# Altium PCB Alarm_Clock.PcbDoc
Units mil, origin at the board's own origin, x right, y up, seen from the top; angles counter-clockwise.
Board outline 3128 x 4371 mil, 2 copper layers (Top Layer, Bottom Layer); 82 components, 70 nets, 265 pads, 19 vias.
Unrouted connection lines stored in the file: 2.
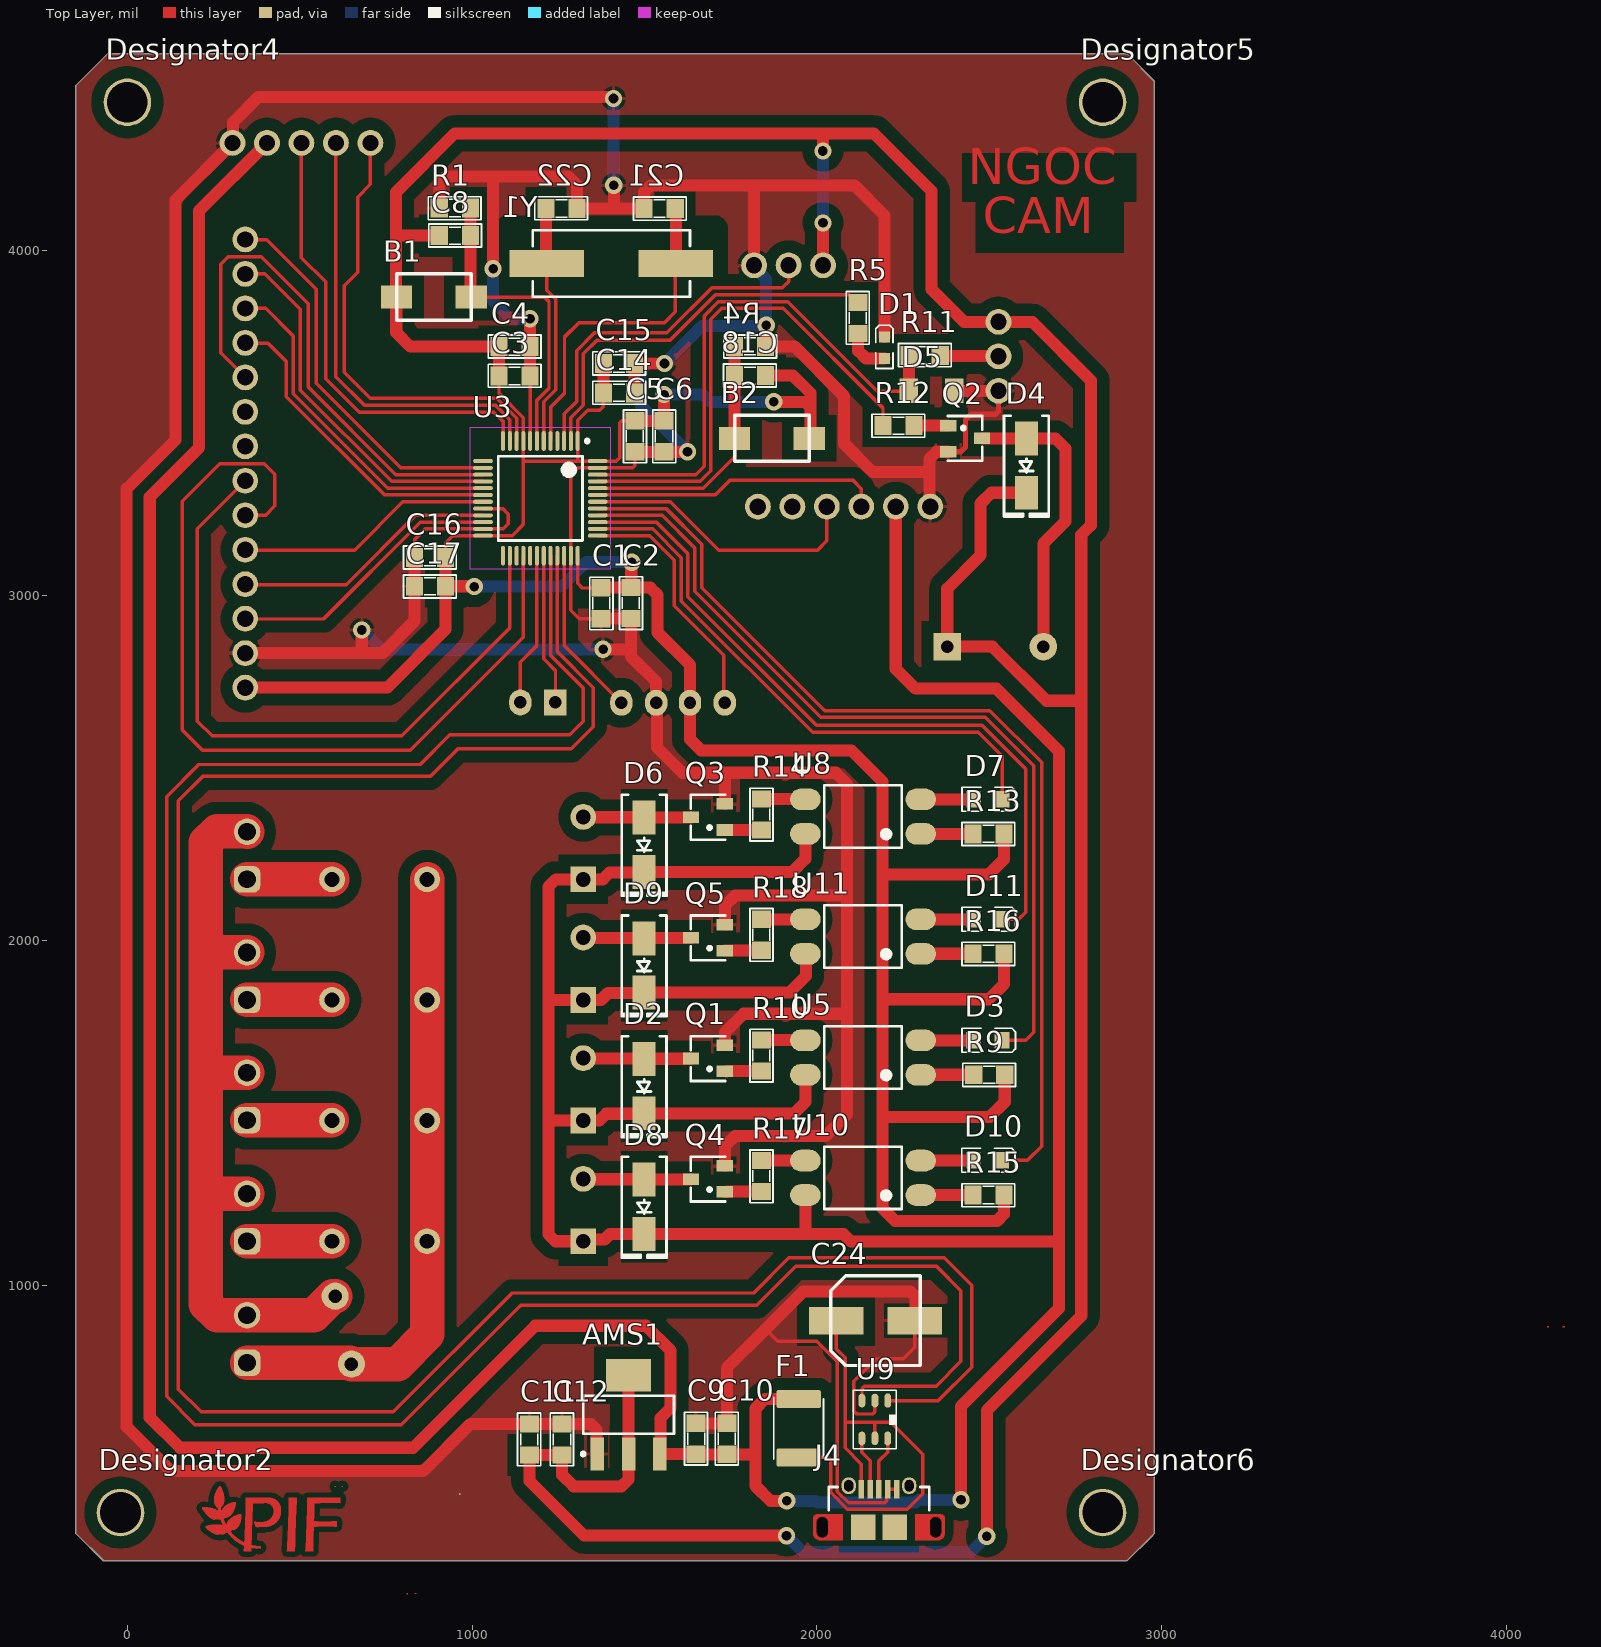
[diagram p0: Top Layer view]
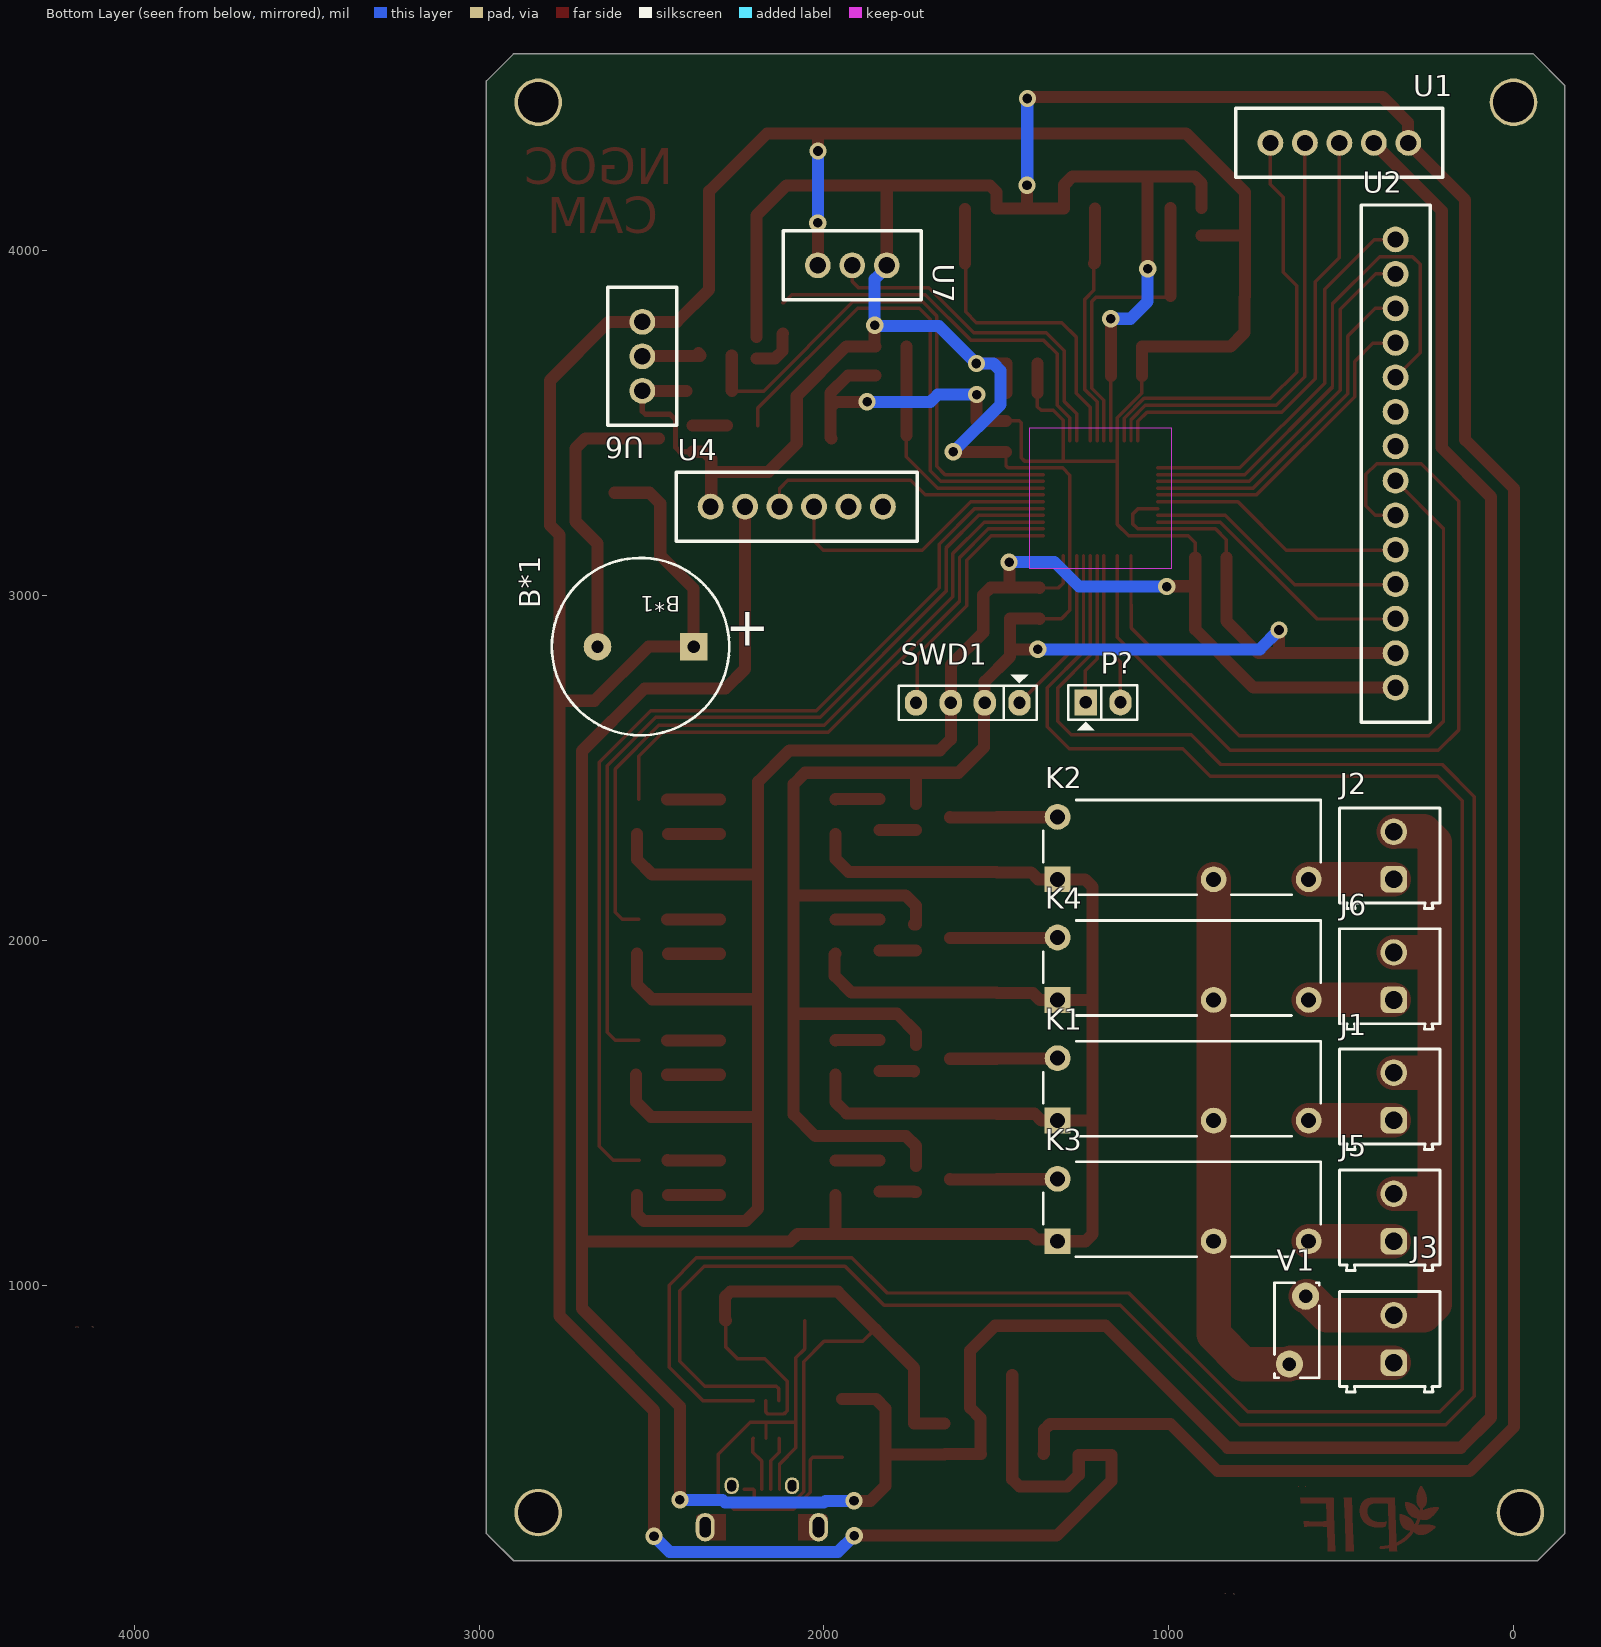
[diagram p1: Bottom Layer view, seen from below]
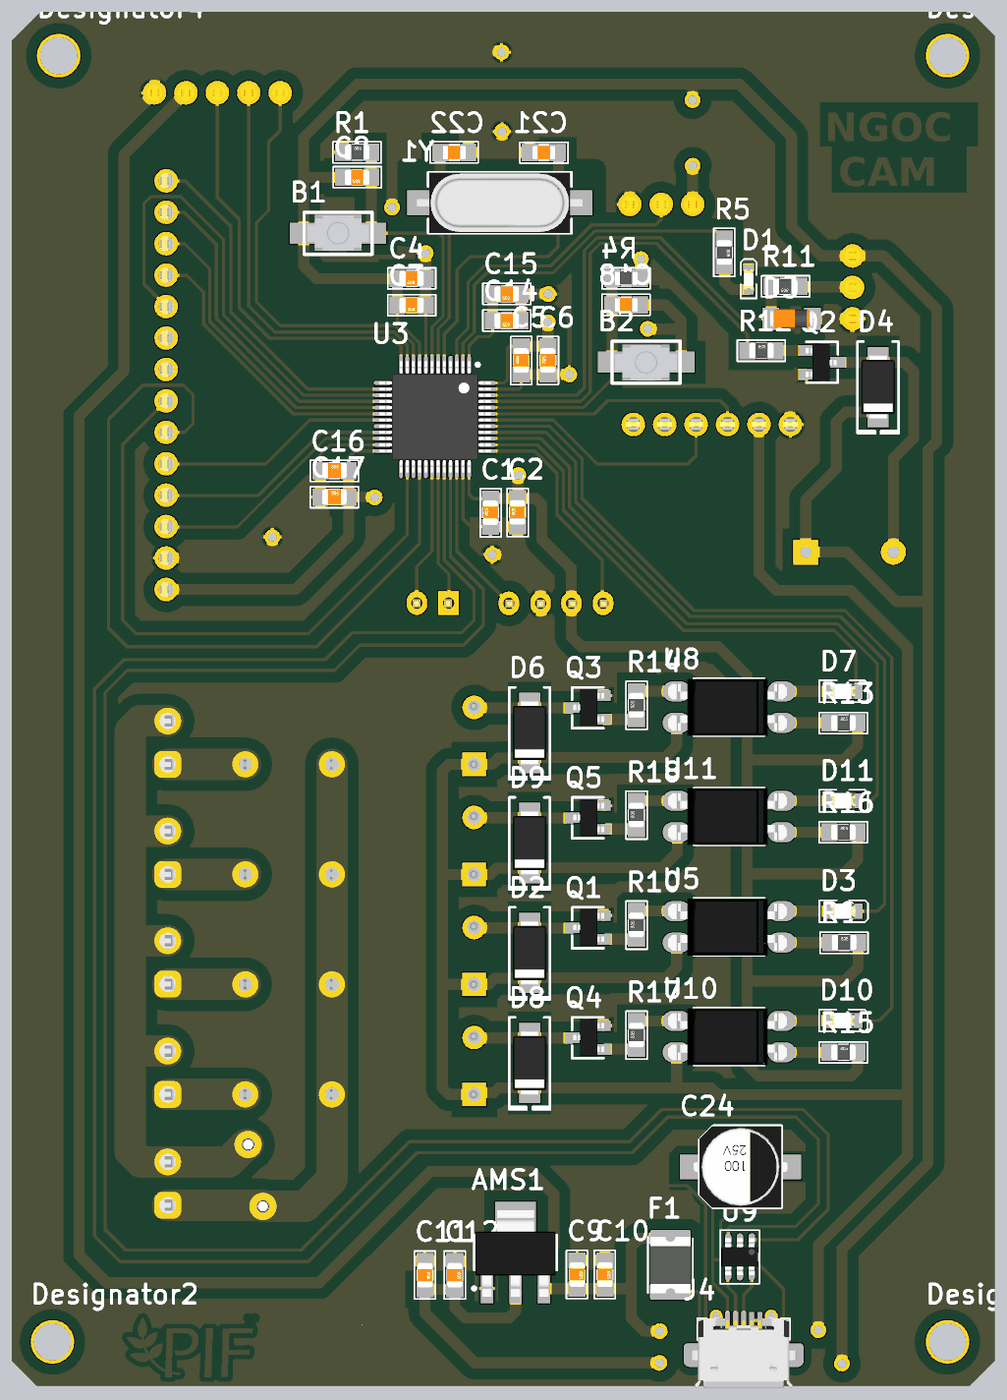
[diagram p2: 3D render of the assembled board from above, using the file's embedded part models]
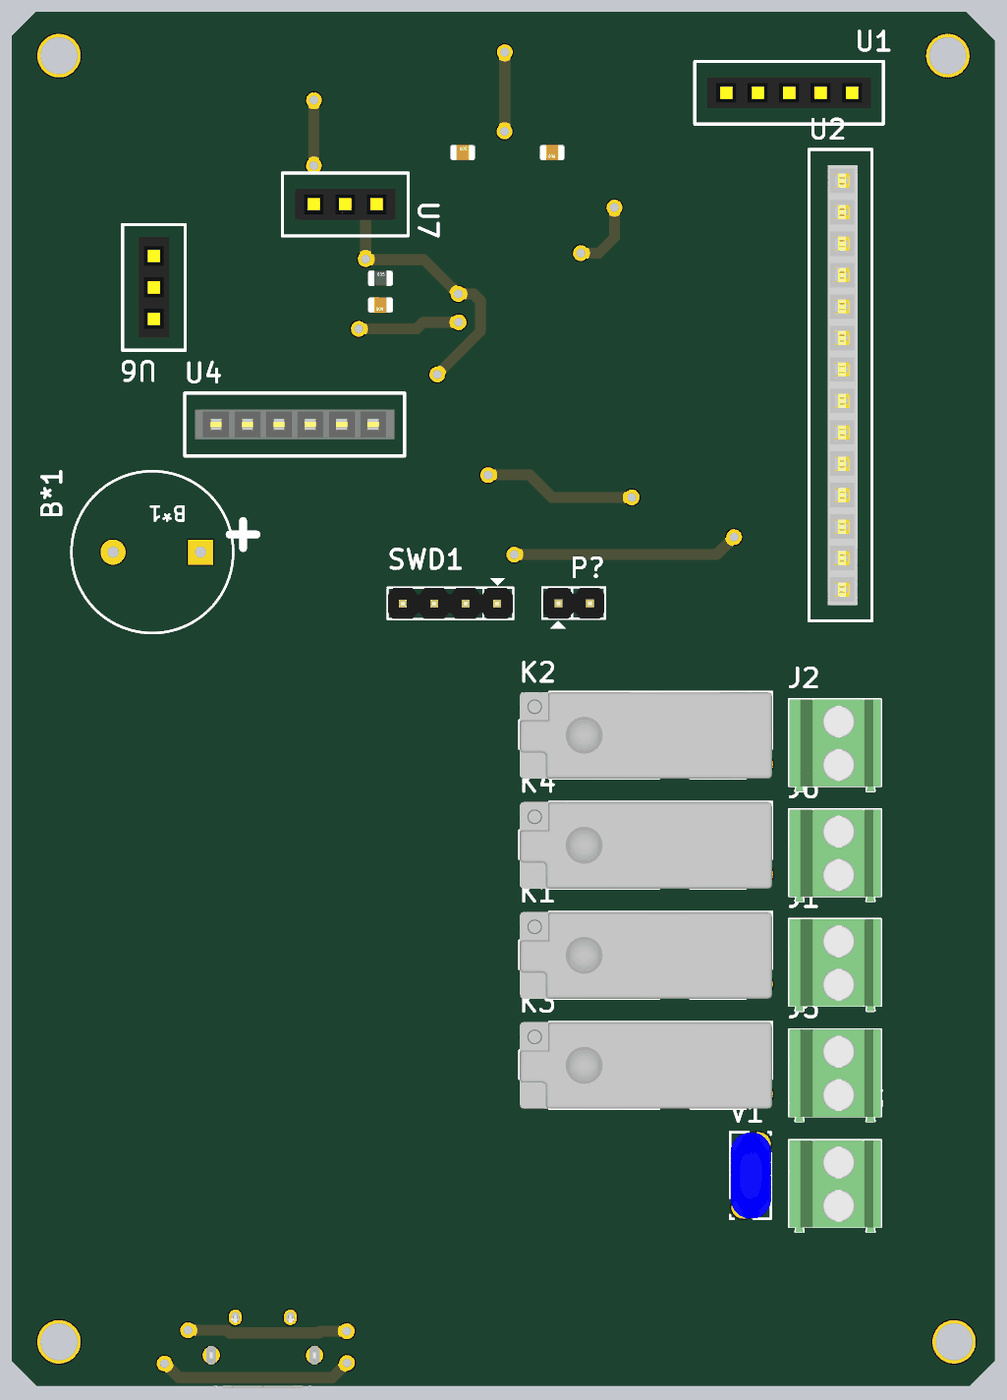
[diagram p3: 3D render of the assembled board from below, using the file's embedded part models]

## Layer stack, top to bottom
Top Solder: solder mask 0.4, Solder Resist, Dk 3.5
Top Layer: signal copper 1.4
Dielectric 1: dielectric 12.6, FR-4, Dk 4.8
Bottom Layer: signal copper 1.4
Bottom Solder: solder mask 0.4, Solder Resist, Dk 3.5

## Board outline
-149,279 -70,200 2900,200 2970,270 2979,279 2979,4493 2901,4571 -58,4571 -149,4480

## Design rules (kind name [scope] priority, off if disabled: settings)
Clearance [All] p1: gap=15 ignorepadtopadclearanceinfootprint=FALSE except(5: Arc-Arc Arc-Track Arc-SMDPad Track-Track Track-SMDPad Track-THPad SMDPad-SMDPad; 35: Arc-Poly Track-Poly SMDPad-Poly THPad-Poly Via-Poly Fill-Poly Poly-Poly)
PolygonConnect [All] p1: connectstyle=Relief reliefconductorwidth=10 reliefentries=4 polygonreliefangle="90 Angle" airgapwidth=10
RoutingVias [All] p1: holewidth=31.5 width=47.24 viastyle="Through Hole" minholewidth=31.5 minwidth=47.24 maxholewidth=31.5 maxwidth=47.24
SolderMaskExpansion [All] p1: expansion=4 istentingtop=FALSE
Width [All] p1: maxlimit=100 minlimit=10 preferedwidth=35
30 further rules are at their usual default settings.

## Classes and differential pairs
component class Alarm_Clock: AMS1 B1 B*1 C1 C2 C3 C4 C5 C6 C8 C9 C10 C11 C12 C14 C15 C16 C17 C18 C21 C22 C24 D1 D2 D3 D4 D5 D6 D7 D8 D9 D10 D11 F1 J1 J2 J3 J4 J5 J6 K1 K2 K3 K4 P? Q1 Q2 Q3 Q4 Q5 R1 R4 R5 R9 R10 R11 R12 R13 R14 R15 R16 R17 R18 SWD1 U1 U2 U3 U4 U5 U6 U7 U8 U9 U10 U11 V1

## Components (designator, comment, footprint, x,y, rotation, side; value= is the part's Value field where it differs from the comment)
AMS1 "AMS1117-3.3V" SOT223 1454,624.17 r0 top value="AMS1117-3.3V SOT223"
B1 "Button SMD 2 Pin 3x4mm" "BUTTON SMD 2 PIN" 997.54,3866 r180 top
B2 "Button SMD 2 Pin 3x4mm" "BUTTON SMD 2 PIN" 1761.46,3456 r0 top
B*1 "Buzzer" BUZZER 2457,2852 r0 bottom
C1 "Cap Non-Pol SMD" CAP-SM-0805 1374.5,2932.5 r90 top value=1uF
C2 "Cap Non-Pol SMD" CAP-SM-0805 1460.5,2933.5 r90 top value=10nF
C3 "Cap Non-Pol SMD" CAP-SM-0805 1168,3637 r180 top value=1uF
C4 "Cap Non-Pol SMD" CAP-SM-0805 1168,3722 r180 top value=10nF
C5 "Cap Non-Pol SMD" CAP-SM-0805 1472,3417 r90 top value=1uF
C6 "Cap Non-Pol SMD" CAP-SM-0805 1557,3417 r90 top value=10nF
C8 "Cap Non-Pol SMD" CAP-SM-0805 995,4044 r180 top value=1uF
C9 "Cap Non-Pol SMD" CAP-SM-0805 1650,599 r270 top value=10uF
C10 "Cap Non-Pol SMD" CAP-SM-0805 1739,599 r270 top value=1uF
C11 "Cap Non-Pol SMD" CAP-SM-0805 1166,597 r270 top value=1uF
C12 "Cap Non-Pol SMD" CAP-SM-0805 1261,597 r270 top value=10uF
C14 "Cap Non-Pol SMD" CAP-SM-0805 1471,3588 r180 top value=1uF
C15 "Cap Non-Pol SMD" CAP-SM-0805 1471,3673 r180 top value=10nF
C16 "Cap Non-Pol SMD" CAP-SM-0805 833,3111 r0 top value=1uF
C17 "Cap Non-Pol SMD" CAP-SM-0805 833,3027 r0 top value=10nF
C18 "Cap Non-Pol SMD" CAP-SM-0805 1761,3638 r0 top value=1uF
C21 "Cap Non-Pol SMD" CAP-SM-0805 1589,4123 r180 top value=10pF
C22 "Cap Non-Pol SMD" CAP-SM-0805 1214,4123 r0 top value=10pF
C24 "47uF" "tu nhom 6.3 (d)" 2170.18,896.57 r0 top
D1 "LED SMD" LED_0603_Blue 2196,3719 r90 top
D2 "SS34" "DIODE SMA" 1499,1577 r270 top
D3 "LED SMD" LED_0805_Blue 2496,1710 r0 top
D4 "SS34" "DIODE SMA" 2608,3377 r270 top
D5 "3.3V" "DIODE ZENNER SMD SOD80" 2333,3594 r180 top
D6 "SS34" "DIODE SMA" 1499,2277 r270 top
D7 "LED SMD" LED_0805_Blue 2496,2409 r0 top
D8 "SS34" "DIODE SMA" 1499,1227 r270 top
D9 "SS34" "DIODE SMA" 1499,1927 r270 top
D10 "LED SMD" LED_0805_Blue 2495,1362 r0 top
D11 "LED SMD" LED_0805_Blue 2496,2061 r0 top
Designator2 "Comment" "LO KHOAN 3MM" -20,340 r0 top
Designator4 "Comment" "LO KHOAN 3MM" 0,4431 r0 top
Designator5 "Comment" "LO KHOAN 3MM" 2829,4431 r0 top
Designator6 "Comment" "LO KHOAN 3MM" 2829,340 r0 top
F1 "2A 24V" "Cau chi tu phuc hoi 2A 24V SMD1812" 1947.18,584.57 r90 top
J1 "10A, 300V" 691214110002 359,1547 r90 bottom
J2 "10A, 300V" 691214110002 359,2245.9 r90 bottom
J3 "10A, 300V" 691214110002 359,843.58 r90 bottom
J4 "Micro USB 2.0 Type AB" 629105150921 2180.18,297.57 r0 top
J5 "10A, 300V" 691214110002 359,1195.9 r90 bottom
J6 "10A, 300V" 691214110002 359,1895.9 r90 bottom
K1 "277 VAC, 30 VDC" HF46F 958.17,1567.55 r0 bottom
K2 "277 VAC, 30 VDC" HF46F 958.17,2267.55 r0 bottom
K3 "277 VAC, 30 VDC" HF46F 958.17,1217.55 r0 bottom
K4 "277 VAC, 30 VDC" HF46F 958.17,1917.55 r0 bottom
P? "Header 2" JP2 1241,2690 r180 bottom
Q1 "HF" SOT-23 1684,1657 r90 top value=C9014
Q2 "HF" SOT-23 2430,3456 r270 top value=C9014
Q3 "HF" SOT-23 1684,2357 r90 top value=C9014
Q4 "HF" SOT-23 1684,1307 r90 top value=C9014
Q5 "HF" SOT-23 1684,2007 r90 top value=C9014
R1 "RESISTOR SMD" RES-SM-0805 905,4124 r0 top value=10K
R4 "RESISTOR SMD" RES-SM-0805 1851,3723 r180 top value=10K
R5 "RESISTOR SMD" RES-SM-0805 2119,3850 r270 top value=300
R9 "RESISTOR SMD" RES-SM-0805 2455,1610 r0 top value=100
R10 "RESISTOR SMD" RES-SM-0805 1839,1621 r90 top value=10K
R11 "RESISTOR SMD" RES-SM-0805 2358,3697 r180 top value=1K
R12 "RESISTOR SMD" RES-SM-0805 2192,3493 r0 top value=10K
R13 "RESISTOR SMD" RES-SM-0805 2453,2309 r0 top value=100
R14 "RESISTOR SMD" RES-SM-0805 1839,2320 r90 top value=10K
R15 "RESISTOR SMD" RES-SM-0805 2453,1261 r0 top value=100
R16 "RESISTOR SMD" RES-SM-0805 2453,1961 r0 top value=100
R17 "RESISTOR SMD" RES-SM-0805 1839,1271 r90 top value=10K
R18 "RESISTOR SMD" RES-SM-0805 1839,1971 r90 top value=10K
SWD1 "Header 4" JP4 1533,2689 r0 bottom
U1 "Rotary Encoder" "Header 5 Pin" 705,4313 r180 bottom
U2 "ILI9341" ILI9341 342,4033 r270 bottom
U3 "STM32F103xx_LQFP48" STM32_LQPF48 1198,3282 r270 top
U4 "DS3231 RTC" DS3231 1929,3058 r0 bottom
U5 "OPTO PC817 SMD" SOP4 2134,1660 r180 top value=PC817
U6 "PIR" PIR 2527,3794 r270 bottom
U7 "DHT11" DHT11 2018,3958 r180 bottom
U8 "OPTO PC817 SMD" SOP4 2134,2359 r180 top value=PC817
U9 "USBLC6-2SC6 TVS" SOT23-6 2173.18,605.57 r270 top
U10 "OPTO PC817 SMD" SOP4 2134,1311 r180 top value=PC817
U11 "OPTO PC817 SMD" SOP4 2134,2011 r180 top value=PC817
V1 "AC 300V" Varistor 629,867 r90 bottom
Y1 "16MHz" WE-XTAL_HC49/4HSMX 1404,3963 r180 top

## Footprints (in the part's own frame and the unit in brackets; to place one, negate y for a bottom-side part, rotate by r counter-clockwise, add the part's x,y. Pads: shape width x height; smd on the part's side, far side on the other; paste and mask are expansions set on the pad)
629105150921 [mm] "Micro USB 2.0 Type AB Horizontal"
  rect 0.4x1.35 smd: 1(-1.3,2.805) 2(-0.65,2.805) 3(0,2.805) 4(0.65,2.805) 5(1.3,2.805)
  round 0 / inner oval 1.4x2.1 / far side oval 1.4x2.1 hole 0.825 slot 1.5 at 90 deg: Shell(-4.175,0)
  oval 1.05x1.25 hole 0.65 slot 0.85 at 90 deg: Shell(-2.225,3.055) Shell(2.225,3.055)
  rect 1.8x1.9 smd: Shell(-1.15,0) Shell(1.15,0)
  round 0 / inner round 0 / far side oval 1.4x2.1 hole 0.825 slot 1.5 at 90 deg: Shell(4.175,0)
  Top Layer region: -4.353,-0.95 -4.544,-0.912 -4.706,-0.804 -4.814,-0.641 -4.852,-0.45 -4.852,-0.45 -4.852,0.65 -4.83,0.765 -4.765,0.862 -4.667,0.927 -4.553,0.95 -4.553,0.95 -2.668,0.95 -2.668,-0.95
  Top Layer region: 4.353,-0.95 4.544,-0.912 4.706,-0.804 4.814,-0.641 4.852,-0.45 4.852,-0.45 4.852,0.65 4.83,0.765 4.765,0.862 4.667,0.927 4.553,0.95 4.553,0.95 2.668,0.95 2.668,-0.95
  silkscreen extent -3.7,1.25 3.7,2.97, body extent -4.3,-2.64 4.3,3.23, height 2.76
691214110002 [mm] "3.50 mm Horizontal Entry Modular, 2p"
  rrect50% 1.95x1.95 hole 1.3: 1(-1.75,-0.3)
  round 1.95 hole 1.3: 2(1.75,-0.3)
  silkscreen extent -3.9,-3.7 3.5,3.7, body extent -3.95,-3.7 3.5,3.7, height 8.55
"BUTTON SMD 2 PIN" [mm] "Button SMD 2 Pin 3x4mm"
  rect 2.3x1.7 smd: 1(0,0) 2(5.5,0)
  silkscreen extent 0,-1.7 5.5,1.7, body extent 0.24,-1.48 5.24,1.42, height 2
BUZZER [mil]
  rect 80x80 hole 36: 1(-78.73,0)
  round 80 hole 36: 2(200,0)
  silkscreen extent -182,-257 332,257
CAP-SM-0805 [mil]
  rect 50x55 smd: 1(0,0) 2(90,0)
  silkscreen extent -32,-34 121,33, body extent 6,-25 84,25, height 31
"Cau chi tu phuc hoi 2A 24V SMD1812" [mm]
  rrect25% 1.34x3.29 smd: 1(-2.15,0) 2(2.15,0)
  silkscreen extent -2.28,-1.83 2.28,1.83, body extent -2.27,-1.62 2.27,1.62, height 1.25
DHT11 [mm]
  round 1.9 hole 1.2: 1(0,0) 2(2.54,0) 3(5.08,0)
  silkscreen extent -2.54,-2.54 7.62,2.54, body extent -1.52,-1.25 6.6,1.25, height 4.75
"DIODE SMA" [mm] "SMA"
  rect 2.5x1.7 smd: 1(-2,0) 2(2,0)
  silkscreen extent -3.68,-1.65 3.75,1.65, body extent -2.6,-1.37 2.6,1.37, height 2.4
"DIODE ZENNER SMD SOD80" [mm] "SOD80"
  rect 1.35x1.8 smd: 1(1.675,0) 2(-1.675,0)
  body extent -1.75,-0.76 1.75,0.74, height 1.45
DS3231 [mm]
  round 1.9 hole 1.2: 1(-2.54,-5.08) 2(0,-5.08) 3(2.54,-5.08) 4(5.08,-5.08) 5(7.62,-5.08) 6(10.16,-5.08)
  silkscreen extent -5.08,-7.62 12.7,-2.54, body extent -4.24,-6.28 11.86,-3.88, height 8.3
"Header 5 Pin" [mm] "2.54mm"
  round 1.9 hole 1.2: 1(0,0) 2(2.54,0) 3(5.08,0) 4(7.62,0) 5(10.16,0)
  silkscreen extent -2.54,-2.54 12.7,2.54, body extent -1.52,-1.25 11.68,1.25, height 4.75
HF46F [mm]
  rect 1.9x1.9 hole 1.1: 1(9.25,2.3)
  round 1.9 hole 1.1: 2(9.25,-2.3) 3(-2.25,2.3) 4(-9.25,2.3)
  silkscreen extent -10.14,-3.55 10.31,3.44, body extent -10.14,-3.55 10.26,3.45, height 15.76
ILI9341 [mm]
  round 1.9 hole 1.2: 1(0,0) 2(2.54,0) 3(5.08,0) 4(7.62,0) 5(10.16,0) 6(12.7,0) 7(15.24,0) 8(17.78,0) 9(20.32,0) 10(22.86,0) 11(25.4,0) 12(27.94,0) 13(30.48,0) 14(33.02,0)
  silkscreen extent -2.54,-2.54 35.56,2.54, body extent -1.27,-1.02 34.29,1.4, height 11.05
JP2 [mil]
  rect 65x75 hole 36: 1(0,0)
  oval 65x75 hole 36: 2(101,0)
  silkscreen extent -50,-81 150,50, body extent -48,-50 148,48, height 323
JP4 [mil] "Jumper 4"
  oval 65x75 hole 36: 1(-100,0) 2(1,0) 3(99,0) 4(200,0)
  silkscreen extent -150,-81 250,50, body extent -148,-48 248,50, height 323
LED_0603_Blue [mm] "Chip LED, 2-Leads, Body 1.6x0.8mm, IPC Medium Density"
  rect 0.8x0.8 smd: 1(-0.8,0) 2(0.8,0)
  silkscreen extent -1.52,-0.64 1.65,0.64, body extent -0.8,-0.4 0.8,0.4, height 0.7
LED_0805_Blue [mm] "Chip LED, 2-Leads, Body 2.0x1.3mm, IPC Medium Density"
  rect 1.1x1.2 smd: 1(-1.05,0) 2(1.05,0)
  silkscreen extent -1.91,-0.89 2.03,0.89, body extent -1,-0.63 1,0.62, height 0.68
"LO KHOAN 3MM" [mil]
  round 138 hole 118.1: 1(0,0)
PIR [mm]
  round 1.9 hole 1.2: 1(0,0) 2(2.54,0) 3(5.08,0)
  silkscreen extent -2.54,-2.54 7.62,2.54, body extent -1.52,-1.25 6.6,1.25, height 4.75
RES-SM-0805 [mil]
  rect 50x55 smd: 1(0,0) 2(90,0)
  silkscreen extent -32,-34 121,33, body extent 6,-25 84,25, height 31
SOP4 [mm]
  oval 2.25x1.6 smd: 1(-4.25,1.27) 2(-4.25,-1.27) 3(4.25,-1.27) 4(4.25,1.27)
  silkscreen extent -2.85,-2.3 2.85,2.3, body extent -4.67,-2.29 4.93,2.31, height 3.6
SOT23-6 [mil]
  oct 40x20 smd: 1(-59.41,32.4)
  oval 40x20 smd: 2(-59.41,-4.6) 3(-59.41,-42.6) 4(50.59,-42.6) 5(50,-5) 6(50.59,32.4)
  silkscreen extent -89,-68 81,57, body extent -64,-64 54,54, height 51
SOT223 [mm]
  rect 1x2.4 smd: 1(-2.3,-2.9) 2(0,-2.9) 3(2.3,-2.9)
  rect 3.3x2.4 smd: 4(0,2.9)
  silkscreen extent -3.47,-3.02 3.35,1.4, body extent -3.25,-3.56 3.25,3.4, height 1.68
SOT-23 [mm] "SOT 23 _ 1-3-2"
  rect 0.85x1.2 smd: 1(-0.94,-1.245) 2(0.985,-1.25) 3(0.005,1.25)
  silkscreen extent -1.65,-1.27 1.65,1.27, body extent -1.47,-1.33 1.53,1.17, height 1.06
STM32_LQPF48 [mm]
  oval 1.45x0.3 smd: 1(-4.225,2.75) 2(-4.225,2.25) 3(-4.225,1.75) 4(-4.225,1.25) 5(-4.225,0.75) 6(-4.225,0.25) 7(-4.225,-0.25) 8(-4.225,-0.75) 9(-4.225,-1.25) 10(-4.225,-1.75) 11(-4.225,-2.25) 12(-4.225,-2.75) 25(4.225,-2.75) 26(4.225,-2.25) 27(4.225,-1.75) 28(4.225,-1.25) 29(4.225,-0.75) 30(4.225,-0.25) 31(4.225,0.25) 32(4.225,0.75) 33(4.225,1.25) 34(4.225,1.75) 35(4.225,2.25) 36(4.225,2.75)
  oval 0.3x1.45 smd: 13(-2.75,-4.225) 14(-2.25,-4.225) 15(-1.75,-4.225) 16(-1.25,-4.225) 17(-0.75,-4.225) 18(-0.25,-4.225) 19(0.25,-4.225) 20(0.75,-4.225) 21(1.25,-4.225) 22(1.75,-4.225) 23(2.25,-4.225) 24(2.75,-4.225) 37(2.75,4.225) 38(2.25,4.225) 39(1.75,4.225) 40(1.25,4.225) 41(0.75,4.225) 42(0.25,4.225) 43(-0.25,4.225) 44(-0.75,4.225) 45(-1.25,4.225) 46(-1.75,4.225) 47(-2.25,4.225) 48(-2.75,4.225)
  silkscreen extent -4.35,-3.1 3.1,3.58, body extent -4.5,-4.5 4.5,4.5, height 1.6
"tu nhom 6.3 (d)" [mm]
  rect 4x2 smd: 1(-2.9,0) 2(2.9,0)
  silkscreen extent -3.3,-3.3 3.3,3.3, body extent -3.8,-3.3 3.8,3.3, height 8
Varistor [mm]
  round 2 hole 1: 1(-2.442,0.535) 2(2.558,-0.665)
  silkscreen extent -3.44,-1.67 3.56,1.63, body extent -3.44,-1.71 3.56,1.59, height 8.5
WE-XTAL_HC49/4HSMX [mm] "Quartz Crystal, size HC49/4HSMX, body 11.4x4.9mm"
  rect 5.5x2 smd: 1(-4.75,0) 2(4.75,0)
  silkscreen extent -5.8,-2.45 5.8,2.45, body extent -6.7,-2.45 6.7,2.45, height 4.3

## Part data
AMS1: library part "AMS1117 SMD", "Dán", Chung_Loai=Dán, Don_Vi=Con, Ma_Hang=MH000596
B1 B2: library part BUTTON
C1 C2 C3 C4 C5 C6 C8 C9 C10 C11 C12 C14 C15 C16 C17 C18 C21 C22: "Capacitor"
C24: library part "Tu Nhom 47uF 50V", "Dán", Chung_Loai=Dán, Don_Vi=Con, Ma_Hang=MH002217, So_Chan=2, Ten_Linh_Kien="Tụ Nhôm 47uF 50V 6.3x5.5MM"
D1 D3 D7 D10 D11: "LED"
D2 D4 D6 D8 D9: library part "Diode SS34 ( 1N5822 )", "Dán", Chung_Loai=Dán, Don_Vi=Con, Ma_Hang=MH002104, Ten_Linh_Kien="Diode SS34 3A 40V SMA ( 1N5822 SS34A)"
D5: library part "Diode Zener 3.3V", "Dán", Chung_Loai=Dán, Don_Vi=Con, Ma_Hang=MH002880, Ten_Linh_Kien="Diode Zener 1/2W 3.3V SMD1206 ZMM3.3"
F1: library part "Cau chi tu phuc hoi 2A 24V SMD1812", "2A 24V SMD1812", Ma_Hang=MH010033, Ten="Cầu Chì Tự Phục Hồi 2A 24V SMD1812"
J1 J2 J3 J5 J6: library part 691214110002, "WR-TBL Series 2141 Horizontal Entry Modular, THT, pitch 3.5mm, 2p", Manufacturer="Wurth Elektronik", Operating Temperature Max=105°C, Operating Temperature Min=-40°C, Rated Current=10A, Working Voltage=300V, Application="Rising Cage Clamp", Category="Terminal Blocks", ComponentLink1Description="Website Link", ComponentLink1URL=https://www.we-online.com/redexpert/article/691214110002?ad, ComponentLink2Description="Supplier 1 URL", ComponentLink2URL=N/A, ComponentLink3Description="Supplier 2 URL", ComponentLink3URL=N/A, ComponentLink4Description="Supplier 3 URL", ComponentLink4URL=https://www.thegioiic.com/kf350-2-v-domino-2-chan-thang-3-5mm-300v-10a-han-pcb, Manufacturer Part Number=691214110002, Match Code=WR-TBL, Modularity=Yes, Mount="Through Hole", Number of Pins=2, Number of Rows=1, Orientation=Horizontal, Packaging=Box, Pitch=3.5mm, Supplier 1 Name=Mouser, Supplier 1 SN=N/A, Supplier 1 URL=N/A, Supplier 2 Name=Digi-Key, Supplier 2 SN=N/A, Supplier 2 URL=N/A, Supplier 3 Name=thegioiic, Supplier 3 SN=N/A, Supplier 3 URL=https://www.thegioiic.com/kf350-2-v-domino-2-chan-thang-3-5mm-300v-10a-han-pcb
J4: library part 629105150921, "Micro USB 2.0 Type AB Receptacle WR-COM, Horizontal, SMT", Contact Resistance="30 mOhm", Operating Temperature="-40 to 85 degC", Rated Current="1.8 A", Working Voltage="30 VAC", ComponentLink1Description=Datasheet, ComponentLink1URL=https://katalog.we-online.de/em/datasheet/629105150921.pdf, ComponentLink2Description="Supplier 1 URL", ComponentLink2URL=N/A, ComponentLink3Description="Supplier 2 URL", ComponentLink3URL=N/A, ComponentLink4Description="Supplier 3 URL", ComponentLink4URL=N/A, Connector Type="Micro USB 2.0 Type AB", Gender=Receptacle, Mounting Technology=SMT, Orientation=Horizontal, Packaging="Tape and Reel", Part Number=629105150921, Published Date="September 2018", Publisher="Wurth Elektronik", Supplier 1 Name=Mouser, Supplier 1 SN=710-629105150921, Supplier 1 URL=https://www.mouser.vn/ProductDetail/Wurth-Elektronik/629105150921?qs=a9WhcLg8qCztfCBvRE9gEg%3D%3D, Supplier 2 Name=Digi-Key, Supplier 2 SN=N/A, Supplier 2 URL=N/A, Supplier 3 Name=thegioiic, Supplier 3 SN=N/A, Supplier 3 URL=N/A
K1 K2 K3 K4: library part "HF46F-G 12-HS1", "Coil Voltage: 12 VDC; Contact Current Rating: 7A; Switching Voltage Max: 277 VAC, 30 VDC", Coil Current=N/A, Coil Voltage="12 VDC", Contact Current Rating=7A, Associated Relay Series=N/A, Coil Resistance=N/A, ComponentLink1Description="Datasheet link", ComponentLink1URL=https://source.hongfa.com//pdf/web/viewer.html?file=/Uploads/Product/PDF/HF46F-G_en.pdf?timestamp=1691116874, ComponentLink2Description="Supplier 1 URL", ComponentLink2URL=N/A, ComponentLink3Description="Supplier 2 URL", ComponentLink3URL=N/A, ComponentLink4Description="Supplier 3 URL", ComponentLink4URL=https://www.thegioiic.com/hf46f-g-12-hs1-ro-le-12vdc-7a-spst-no-4-chan, Power Consumption=N/A, Supplier 1 Name=Mouser, Supplier 1 SN=N/A, Supplier 1 URL=N/A, Supplier 2 Name=Digi-Key, Supplier 2 SN=N/A, Supplier 2 URL=N/A, Supplier 3 Name=thegioiic, Supplier 3 SN=N/A, Supplier 3 URL=https://www.thegioiic.com/hf46f-g-12-hs1-ro-le-12vdc-7a-spst-no-4-chan, Switching Voltage Max="277 VAC, 30 VDC"
P?: "Header, 2-Pin", LatestRevisionDate=17-Jul-2002, LatestRevisionNote="Re-released for DXP Platform.", Publisher="Altium Limited"
Q1 Q2 Q3 Q4 Q5: library part "Trans C1815 HF SMD", "SOT-23"
R1 R4 R5 R9 R10 R11 R12 R13 R14 R15 R16 R17 R18: "Resistor"
SWD1: "Header, 4-Pin", LatestRevisionDate=17-Jul-2002, LatestRevisionNote="Re-released for DXP Platform.", Publisher="Altium Limited"
U2: "ILI9341 Module 3.2 240x320"
U4: library part DS3231, "DS3231 RTC Module"
U5 U8 U10 U11: "Single Opto"
U9: library part IC_LTC6992IS6-1, "Oscillator, Silicon IC 3.81Hz ~ 1MHz TSOT-23-6", Alternate Part Number-1=NA, Case/Package=SOT-23-6, Manufacturer="Linear Technology/Analog Devices", Manufacturer Part Number=LTC6992IS6-1, Supplier Part Number-1=LTC6992IS6-1#TRMPBF, Supplier-1=Arrow
V1: library part 05000730110, "Varistors 7D471K AC 300V", Capacitance=N/A, Manufacture  Name=Bourns, Manufacture  SN=7D471K, Tolerance="+/- 10%", Voltage=300V, ComponentLink1Description="Datasheet link", ComponentLink1URL=N/A, ComponentLink2Description="Supplier 1 URL", ComponentLink2URL=N/A, ComponentLink3Description="Supplier 2 URL", ComponentLink3URL=N/A, ComponentLink4Description="Supplier 3 URL", ComponentLink4URL=N/A, Diameter=7mm, Supplier 1 Name=Mouser, Supplier 1 SN=N/A, Supplier 1 URL=N/A, Supplier 2 Name=Digi-Key, Supplier 2 SN=N/A, Supplier 2 URL=N/A, Supplier 3 Name=thegioiic, Supplier 3 SN=N/A, Supplier 3 URL=https://www.thegioiic.com/tu-chong-set-varistor-7d471k-300v
Y1: library part 071105166016, "WE-XTAL Quartz Crystal, SMT, HC49/4HSMX, 16MHz, +/-30ppm", Frequency Stability=+/-50ppm, Frequency Tolerance=+/-30ppm, Load Capacitance=16pF, Manufacturer="Wurth Elektronik", Manufacturer Part Number=830003237, Operating Temperature="-10 to +60degC", ComponentLink1Description="Datasheet link", ComponentLink1URL=https://katalog.we-online.com/pbs/datasheet/830003237.pdf, ComponentLink2Description="Supplier 1 URL", ComponentLink2URL=https://www.mouser.com/ProductDetail/Wurth-Elektronik/830003237?qs=2WXlatMagcFy7La1wROd1w%3D%3D, ComponentLink3Description="Supplier 2 URL", ComponentLink3URL=https://www.digikey.com/en/products/detail/w%C3%BCrth-elektronik/830003237/13979248, ComponentLink4Description="Supplier 3 URL", ComponentLink4URL=https://www.thegioiic.com/thach-anh-16mhz-2-chan-smd-hc49-s, Frequency=16MHz, Mounting Technology=SMT, Size=HC49/4HSMX, Supplier 1 Name=Mouser, Supplier 1 SN=710-830003237, Supplier 1 URL=https://www.mouser.com/ProductDetail/Wurth-Elektronik/830003237?qs=2WXlatMagcFy7La1wROd1w%3D%3D, Supplier 2 Name=Digi-Key, Supplier 2 SN=732-830003237TR-ND, Supplier 2 URL=https://www.digikey.com/en/products/detail/w%C3%BCrth-elektronik/830003237/13979248, Supplier 3 Name=thegioiic, Supplier 3 SN=N/A, Supplier 3 URL=https://www.thegioiic.com/thach-anh-16mhz-2-chan-smd-hc49-s
U3: ComponentLink1Description="Manufacturer Link", ComponentLink1URL=www.st.com/stm32, ComponentLink2Description=Datasheet, ComponentLink2URL=http://www.st.com/stonline/products/literature/ds/13587.pdf, DatasheetVersion="rev6, Mar-2008", PackageDescription="48-Pin Low-Profile Quad Flat Pack, 7 x 7 mm Body, 0.5 mm Pitch (LQFP48)", PackageReference=LQFP48, PackageVersion=Mar-2008, Published=30-May-2008, Publisher="Altium Limited"

## Via types
v1: diameter 50, hole 28, Top Layer to Bottom Layer, 19 vias

## Nets (pads, with @x,y where several pads share a name; then routed paths per layer and width w, separated by ;. In a path a pad name is that pad's centre, name@x,y a point inside that pad or via, vN(x,y) a via of type N, cw(c..) or ccw(c..) an arc to the next point about the centre after c; other vN are vias at no path point)
+3.3V: AMS1.2 AMS1.4 B1.2 B2.2 B*1.1 C1.2 C2.2 C3.2 C4.2 C5.2 C6.2 C8.2 C11.2 C12.2 C14.2 C15.2 C16.2 C17.2 C18.2 D4.2 R9.2 R13.2 R15.2 R16.2 SWD1.3 U2.7 U2.14 U3.1 U3.9 U3.24 U3.36 U3.48 U6.1 U7.1 | length 18901.2
  Top Layer w10: C16.2 923,3153 943.73,3173.73 U3.24 1116.27,3173.73 1148.79,3206.25 1148.79,3390.27 ; C3.2 1078,3587 1148.79,3516.21 U3.9 1148.79,3390.27 ; U3.36 1306.27,3035.73 1320,3022 1373,3022 1373.5,3021.5 C1.2 ; C14.2 1381,3548 1370,3537 1335,3537 1306.27,3508.27 U3.1 1306.27,3390.27 ; C5.2 1433.86,3507 1428,3501.14 1428,3400 1418.27,3390.27 U3.48 1306.27,3390.27 ; 1148.79,3390.27 1306.27,3390.27
  Top Layer w35: U2.14 754,2733 923,2902 C17.2 ; B1.2@779,3868 779,4038 ; B1.2@780,3865 780,3763 821,3722 C4.2 C3.2 ; C8.2 785,4044 779,4038 ; C16.2 C17.2 ; v1(1006,3026) 1005,3027 C17.2 ; C1.2 1375,3023 1460,3023 C2.2 ; C14.2 C15.2 ; AMS1.4 AMS1.2 1454,436.5 1433.5,416 1294.5,416 1261,449.5 C12.2 C11.2 1166,432.11 1325.11,273 v1(1912.16,273) ; v1(1463,3097) 1461.75,3095.75 1461.75,3024.75 C2.2 ; C5.2 C6.2 v1(1557,3583) ; C18.2 1931,3638 1981,3588 1981,3546 ; v1(1875,3562) 1876,3561 1966,3561 1981,3546 ; B2.2 1981,3459 1981,3546 ; v1(2017.5,4289.5) 2018,4290 2018,4341 ; U7.1 v1(2018,4081) ; v1(2493,271) 2493,636 2767,910 2767,2691 ; R15.2 2543,1206.5 2522.5,1186 2227,1186 2191,1222 2191,1488 ; R16.2 2543,1873 2499,1829 2191,1829 ; R13.2 2543,2235 2499,2191 2200,2191 2191,2182 ; R9.2 2545,1531 2502,1488 2191,1488 ; D4.2 2506.26,3298.26 2475,3267 2475,3117 2378.27,3020.27 B*1.1 2509,2852 2666,2695 2763,2695 2767,2691 ; 779,4038 779,4170 950,4341 2018,4341 ; C2.2 1470.13,3023.5 1470.5,3023.13 1516.87,3023.13 1538,3002 1538,2893 1632,2799 SWD1.3 1632,2583 1664,2551 2100,2551 2191,2460 2191,2182 ; 2018,4341 2165,4341 2333,4173 2333,3888 2427,3794 U6.1 2625,3794 2795,3624 2795,3204 2767,3176 2767,2691 ; 2191,1488 2191,1829 ; 2191,1829 2191,2182
  Bottom Layer w35: v1(1006,3026) 1260,3026 1332,3098 1462,3098 v1(1463,3097) ; v1(1557,3583) 1670,3583 1691,3562 v1(1875,3562) ; v1(1912.16,273) 1959.16,226 2448,226 v1(2493,271) ; v1(2017.5,4289.5) 2017.75,4289.25 2017.75,4081.25 v1(2018,4081)
+5V: AMS1.3 C9.2 C10.2 D2.2 D6.2 D8.2 D9.2 F1.2 K1.1 K2.1 K3.1 K4.1 U1.4 U4.5 U5.4 U8.4 U10.4 U11.4 | length 15638.2
  Top Layer w35: U1.4 208,4116 208,3429 65,3286 65,616 153,528 829,528 1183,882 1504,882 1576,810 1576,644 1546,614 1546,511.45 AMS1.3 1545.05,509.5 1649.5,509.5 C9.2 C10.2 1822,509 ; v1(1913,374) 1865,374 1822,417 1822,509 ; F1.2 1849.21,669.21 1822,642 1822,509 ; U10.4 1966.68,1155.5 1959.43,1148.26 ; U5.4 1966.68,1530.68 1934.26,1498.26 D2.2 1497.74,1497 1389,1497 1369,1477 K1.1 1222,1477 1221,1476 ; U11.4 1969,1958.68 1969,1897 1920.26,1848.26 D9.2 1497.74,1847 1394,1847 1374,1827 K4.1 1221,1827 ; U8.4 1966.68,2236.32 1928.61,2198.26 D6.2 1497.74,2197 1399,2197 1379,2177 K2.1 1243,2177 1221,2155 1221,1827 ; U4.5 2229,2787 2286,2730 2521,2730 2702,2549 2702,1126 ; v1(2418,377) 2418,648 2702,932 2702,1126 ; 1221,1476 1221,1827 ; 1221,1476 1221,1147.5 1241.5,1127 K3.1 1327.35,1132 1384,1132 1400.26,1148.26 D8.2 1959.43,1148.26 ; 1959.43,1148.26 2076.74,1148.26 2099,1126 2702,1126
  Bottom Layer w35: v1(1913,374) 1995.41,374 2000.8,368.61 2286.54,368.61 2294.93,377 v1(2418,377)
BOOT0: B2.1 C18.1 R4.2 U3.44 | length 746.3
  Top Layer w10: U3.44 1670.53,3311.53 1761.46,3402.46 B2.1
  Top Layer w35: B2.1@1761,3465 C18.1 R4.2
BUZZER: R12.1 U3.45 | length 1464.8
  Top Layer w10: U3.45 1661.21,3331.21 1692,3362 1692,3802 1724,3834 1902,3834 2192,3544 R12.1
CH1_TIM2: U1.1 U3.10 | length 1318.1
  Top Layer w10: U1.1 705,4193 668,4156 668,3938 629,3899 629,3648 705,3572 1071.79,3572 1129.1,3514.68 U3.10
CH2_TIM2: U1.2 U3.11 | length 1296.2
  Top Layer w10: U1.2 605,3635 688,3552 1068,3552 1109.42,3510.58 U3.11
GND: AMS1.1 C1.1 C2.1 C3.1 C4.1 C5.1 C6.1 C9.1 C10.1 C11.1 C12.1 C14.1 C15.1 C16.1 C17.1 C21.2 C22.2 C24.2 D1.2 D5.2 J4.4 J4.5 Q1.2 Q2.2 Q3.2 Q4.2 Q5.2 R1.1 R4.1 SWD1.2 U1.5 U2.13 U3.8 U3.20 U3.23 U3.35 U3.47 U4.6 U6.3 U7.3 U9.2 | length 20999.8
  Top Layer w10: C16.1 833,3162 864.42,3193.42 U3.23 1090.42,3193.42 1105,3208 1105,3236 1088.53,3252.47 U3.20 ; C3.1 1168.47,3636.53 U3.8 ; C1.1 1374,2933 1311,2933 1286.58,2957.42 U3.35 1286.58,3349.58 1307.58,3370.58 U3.47 1466.14,3370.58 1472,3376.44 C5.1 ; 1849.5,870.5 1853.5,870.5 1887,837 2000,837 2059,778 2059,401 2092,368 2197.04,368 2202.9,373.86 2202.9,405.13 J4.4 J4.5 ; U9.2 2168.58,631.86 2162.72,626 2116,626 2107,635 2107,721 2172,786 2251,786 2284.35,819.35 C24.2
  Top Layer w15: Q2.2 2418.2,3417.2 2431,3430 2431,3510 2447,3526 2518.21,3526 2527,3534.79 U6.3
  Top Layer w35: U2.13 676,2833 ; v1(680,2900) 680,2837 676,2833 ; C16.1 C17.1 833,2926 740,2833 676,2833 ; R1.1 905,4195.5 925.5,4216 1061,4216 ; v1(1061,3948) 1061,4216 ; C3.1 C4.1 v1(1168,3803) ; AMS1.1 1361.26,512.19 1361.26,580.23 1344.5,597 C12.1 C11.1 1165.5,597.5 995.5,597.5 858,460 127,460 -2,589 -2,3310 140,3452 140,4148 U1.5 306,4314 306,4372 380,4446 1395.39,4446 1396.52,4444.87 1407.13,4444.87 v1(1410,4442) ; C1.1 1375,2933 1460,2933 C2.1 1460.5,2844 ; v1(1380,2844) 1460.5,2844 ; v1(1411,4190) 1411,4123 ; C14.1 C15.1 v1(1558,3673) ; C5.1 C6.1 v1(1625,3417) ; C9.1 C10.1 1739,760 1849.5,870.5 1960,981 2271.5,981 2287,965.5 2287,899.21 C24.2 ; Q4.2 1733.21,1403.21 1762,1432 2025,1432 2088,1495 2088,1787 ; Q1.2 1733.21,1732.5 1787.72,1787 2088,1787 ; Q3.2 1733.21,2484 ; Q5.2@1739.34,2046.57 1738.57,2045.8 Q5.2 1733.21,2100.21 1763,2130 2084,2130 2088,2134 ; U7.3 1818,4185 1813,4190 ; v1(1853,3784) 1853,3725 R4.1 1935,3723 2079,3579 2079,3441 2161,3359 2327,3359 ; D1.2 2196,4103 2109,4190 1813,4190 ; U4.6@2327,3260 2327,3359 ; Q2.2 2347.5,3417.2 2327,3396.7 2327,3359 ; D5.2 U6.3 ; 1061,4216 1279,4216 1304,4191 C22.2 1411,4123 ; 1411,4123 C21.2 1499,4170 1519,4190 1813,4190 ; 1460.5,2844 1460.5,2823.5 1534,2750 SWD1.2 1536,2687 1536,2560 1610,2486 2055,2486 2088,2453 2088,2134 ; 2088,1787 2088,2134
  Bottom Layer w35: v1(680,2900) 736,2844 v1(1380,2844) ; v1(1061,3948) 1061,3853 1111,3803 v1(1168,3803) ; v1(1410,4442) 1410.5,4441.5 1410.5,4190.5 v1(1411,4190) ; v1(1625,3417) 1488,3554 1488,3652.5 1508.5,3673 v1(1558,3673) 1667,3782 1851,3782 v1(1853,3784) 1853,3917.6 1818,3952.6 U7.3
L: J3.1 K1.3 K2.3 K3.3 K4.3 V1.1 | length 1874.4
  Top Layer w100: J3.1 V1.1@646.24,774.68 ; V1.1 783.76,770.86 869.59,856.69 K3.3 K1.3 K2.3
MISO_SPI1: U2.2 U3.16 | length 1076
  Top Layer w10: U2.2 399,3933 502,3830 502,3596 766.79,3331.21 U3.16
MISO_SPI2: U3.27
MOSI_SPI1: U2.3 U3.17 | length 1003.5
  Top Layer w10: U2.3 401,3833 481,3753 481,3586 755.47,3311.53 U3.17
MOSI_SPI2: U2.9 U3.28 | length 2567
  Top Layer w10: U2.9 401,3233 428,3260 428,3352 397,3383 268,3383 159,3274 159,2610 218,2551 821,2551 1148.79,2878.79 U3.28
N: J1.2 J2.2 J3.2 J5.2 J6.2 V1.2 | length 2242.3
  Top Layer w100: J5.2 229.2,1264.8 228,1266 ; J1.2 228.9,1615.9 228,1615 ; J6.2 229.8,1964.8 228,1963 ; J2.2 345.98,2316 260.22,2316 228,2283.78 228,1963 ; V1.2 596.39,967.71 541.16,912.47 J3.2 260.22,912.47 228,944.69 228,1266 ; 228,1266 228,1615 ; 228,1615 228,1963
NetB*1_2: B*1.2 D4.1 Q2.3 | length 858.2
  Top Layer w35: Q2.3 2608.03,3455.77 2608.26,3456 2692,3456 2721,3427 2721,3215 2657,3151 B*1.2 B*1.2@2659,2854
NetC24_1: C24.1 F1.1 J4.1 U9.5 | length 1438.5
  Top Layer w10: F1.1 2032.54,499.92 2040,492.46 2040,398.41 2088.41,350 2262,350 2307,395 2307,509 2214.43,601.57 2166.43,601.57 ; C24.1 2056.18,896.39 2056.18,814.57 2082,788.75 2082,601.57 ; J4.1 2129,480.75 2082,527.75 2082,601.57 ; U9.5 2168.18,599.82 2166.43,601.57 ; 2082,601.57 2166.43,601.57
NetD1_1: D1.1 R5.2 | length 135.7
  Top Layer w35: R5.2 2120,3759 2120,3710 2142.5,3687.5 D1.1
NetD2_1: D2.1 K1.2 Q1.3 | length 314
  Top Layer w35: K1.2 1323.53,1656.92 1497.82,1656.92 D2.1 1499.73,1656.47 1634.06,1656.47 Q1.3
NetD3_1: D3.1 U5.2 | length 153.3
  Top Layer w35: U5.2 D3.1
NetD6_1: D6.1 K2.2 Q3.3 | length 313.4
  Top Layer w35: K2.2 1323.53,2356.92 1497.82,2356.92 1498.37,2356.37 1634.16,2356.37 Q3.3@1634.79,2357
NetD7_1: D7.1 U8.2 | length 153.3
  Top Layer w35: U8.2 D7.1
NetD8_1: D8.1 K3.2 Q4.3 | length 313.4
  Top Layer w35: K3.2 1323.53,1306.92 1497.82,1306.92 1498.27,1306.47 1634.06,1306.47 Q4.3
NetD9_1: D9.1 K4.2 Q5.3 | length 313.4
  Top Layer w35: K4.2 1323.53,2006.92 1497.82,2006.92 1498.27,2006.47 1634.06,2006.47 Q5.3
NetD10_1: D10.1 U10.2 | length 152.8
  Top Layer w35: U10.2 2301.82,1361.5 2453.16,1361.5 D10.1
NetD11_1: D11.1 U11.2 | length 153.3
  Top Layer w35: U11.2 D11.1
NetJ1_1: J1.1 K1.4 | length 247.3
  Top Layer w35: J1.1 J1.1@347.74,1477.55 ; K1.4@593.45,1477.55 K1.4
  Top Layer w100: J1.1@347.74,1477.55 K1.4@593.45,1477.55
NetJ2_1: J2.1 K2.4 | length 246.8
  Top Layer w100: J2.1 K2.4
NetJ4_2: J4.2 U9.4 | length 157.3
  Top Layer w10: U9.4 2130.18,554.58 2130.18,514.57 2154.59,490.16 J4.2
NetJ4_3: J4.3 U9.6 | length 158
  Top Layer w10: J4.3 2180.18,489.57 2206.18,515.57 2206.18,554.38 U9.6
NetJ5_1: J5.1 K3.4 | length 246.8
  Top Layer w100: J5.1 K3.4
NetJ6_1: J6.1 K4.4 | length 246.8
  Top Layer w100: J6.1 K4.4
NetQ1_1: Q1.1 R10.1 | length 101.1
  Top Layer w35: Q1.1@1738.35,1620 1739.35,1621 R10.1
NetQ2_1: Q2.1 R12.2 | length 99
  Top Layer w35: R12.2 Q2.1
NetQ3_1: Q3.1 R14.1 | length 106
  Top Layer w35: Q3.1 R14.1
NetQ4_1: Q4.1 R17.1 | length 106.4
  Top Layer w35: Q4.1 1738.35,1270 1739.35,1271 R17.1
NetQ5_1: Q5.1 R18.1 | length 106.4
  Top Layer w35: Q5.1 1738.35,1970 1739.35,1971 R18.1
NetR9_1: R9.1 U5.1 | length 153.7
  Top Layer w35: U5.1 R9.1
NetR10_2: R10.2 U5.3 | length 128.1
  Top Layer w35: R10.2 1839.5,1710.5 1966.18,1710.5 U5.3
NetR11_1: R11.1 U6.2 | length 178.7
  Top Layer w35: R11.1@2364,3703 R11.1 2359.5,3695.5 2525.5,3695.5 U6.2
NetR13_1: R13.1 U8.1 | length 151.7
  Top Layer w35: U8.1 R13.1
NetR14_2: R14.2 U8.3 | length 128.1
  Top Layer w35: R14.2 1839.5,2409.5 1966.18,2409.5 U8.3
NetR15_1: R15.1 U10.1 | length 151.7
  Top Layer w35: U10.1 R15.1
NetR16_1: R16.1 U11.1 | length 151.7
  Top Layer w35: U11.1 R16.1
NetR17_2: R17.2 U10.3 | length 127.7
  Top Layer w35: R17.2 U10.3
NetR18_2: R18.2 U11.3 | length 127.7
  Top Layer w35: R18.2 U11.3
OSCIN: C21.1 U3.5 Y1.1 | length 968.5
  Top Layer w10: U3.5 1227.53,3546.53 1268,3587 1268,3750 1310,3792 1558,3792 1589,3823 1589,3960.99 Y1.1
  Top Layer w35: Y1.1 C21.1@1591.01,4120.99
OSCOUT: C22.1 U3.6 Y1.2 | length 701.2
  Top Layer w10: U3.6 1207.84,3561.84 1243,3597 1243,3860 1216.99,3886.01 Y1.2
  Top Layer w35: C22.1 1214,3965.99 Y1.2
PA2: U1.3 U3.12 | length 1335.8
  Top Layer w10: U1.3 505,3980 575,3910 575,3629.13 672.13,3532 1063,3532 1089.73,3505.27 U3.12
PA4: U2.1 U3.14 | length 1123.4
  Top Layer w10: U2.1 343,4032 404,4032 548,3888 548,3616 793.42,3370.58 U3.14
PA15: D7.2 U3.38 | length 1644.8
  Top Layer w10: U3.38 1523.58,3193.42 1607,3110 1607,2984 1988,2603 2468,2603 2537.34,2533.66 D7.2
PB0: U2.4 U3.18 | length 932.1
  Top Layer w10: U2.4 343,3732 408,3732 461,3679 461,3577 746.16,3291.84 U3.18
PB1: U2.10 U3.19 | length 748.1
  Top Layer w10: U2.10 343,3132 659,3132 799.16,3272.16 U3.19
PB3: D11.2 U3.39 | length 2103.9
  Top Layer w10: U3.39 1534.9,3213.1 1626,3122 1626,2997 1999,2624 2479,2624 2606,2497 2606,2082 2585,2061 D11.2
PB4: D3.2 U3.40 | length 2513.7
  Top Layer w10: U3.40 1551.21,3232.79 1646,3138 1646,3012 2011,2647 2488,2647 2629,2506 2629,1733 2606,1710 D3.2
PB5: D10.2 U3.41 | length 2912.2
  Top Layer w10: U3.41 1562.53,3252.47 1666,3149 1666,3023 2023,2666 2502,2666 2652,2516 2652,1403 2611,1362 D10.2
PB9: D5.1 R11.2 U3.46 | length 1576.8
  Top Layer w10: U3.46 1648.9,3350.9 1673,3375 1673,3811 1714,3852 1916,3852 2175,3593 2266.06,3593 D5.1
  Top Layer w35: D5.1 2267.53,3594.47 2267.53,3696.53 R11.2
PB10: U2.11 U3.21 | length 773.2
  Top Layer w10: U2.11 343,3032 635,3032 835.79,3232.79 U3.21
PB11: U2.12 U3.22 | length 806.5
  Top Layer w10: U2.12 343,2932 569,2932 850.1,3213.1 U3.22
PC13: R5.1 U3.2 | length 1144.5
  Top Layer w10: U3.2 1286.58,3516.2 1323,3552.62 1323,3701 1362,3740 1573,3740 1706,3873 2093.5,3873 2116.5,3850 R5.1
PC14: U3.3 U7.2 | length 1021.9
  Top Layer w10: U3.3 1266.9,3526.9 1303,3563 1303,3710 1355,3762 1565,3762 1696,3893 1900,3893 1918,3911 U7.2
RESET: B1.1 C8.1 R1.2 U3.7 | length 904.9
  Top Layer w10: B1.1 1210,3866 1223,3853 1223,3602 1188.16,3567.16 U3.7
  Top Layer w35: B1.1@995,3869 C8.1 R1.2
RX_UART1: P?.1 U3.31 | length 440.2
  Top Layer w10: U3.31 1207.84,2816.16 1242,2782 1242,2691 P?.1
SCK_SPI1: U2.5 U3.15 | length 1530.2
  Top Layer w10: U2.5 271,3704 271,3961 293,3983 388,3983 525,3846 525,3605 779.1,3350.9 U3.15
SCK_SPI2: U2.8 U3.26 | length 2017.9
  Top Layer w10: U2.8 203,3194 203,2636 246,2593 796,2593 1109,2906 1109,2973 1109.42,2973.42 U3.26
SCL_I2C1: U3.42 U4.3 | length 832.9
  Top Layer w10: U3.42 1574.84,3272.16 1715,3132 2002,3132 2029,3159 U4.3
SDA_I2C1: U3.43 U4.4 | length 844.1
  Top Layer w10: U3.43 1700.84,3291.84 1701,3292 1706,3292 1748,3334 2105,3334 2129,3310 U4.4
SWCLK: SWD1.4 U3.37 | length 725.8
  Top Layer w10: U3.37 1515.27,3173.73 1586,3103 1586,2971 1730,2827 1730,2692 SWD1.4
SWDIO: SWD1.1 U3.34 | length 495.5
  Top Layer w10: U3.34 1266.9,2855.1 SWD1.1
TX_UART1: P?.2 U3.30 | length 445.6
  Top Layer w10: P?.2 1140,2807 1188.16,2855.16 U3.30
USB_DM: U3.32 U9.3 | length 6675.9
  Top Layer w10: U3.32 1227.53,2826.47 1322,2732 1322,2635 1283,2596 935,2596 849,2510 207,2510 114,2417 114,677 196,595 794,595 1141,942 1826,942 1939,1055 2347,1055 2418,984 2418,779 2346,707 2138,707 2131,700 2131,665.39 U9.3
USB_DP: U3.33 U9.1 | length 6606.9
  Top Layer w10: U3.33 1247.21,2837.79 1352,2733 1352,2620 1288,2556 959,2556 879.3,2476.3 219.3,2476.3 148,2405 148,698 214,632 771,632 1116,977 1817,977 1919,1079 2370,1079 2449,1000 2449,762 2352,665 U9.1
pads on no net: Designator2.1 Designator4.1 Designator5.1 Designator6.1 J4.Shell U2.6 U3.4 U3.13 U3.25 U3.29 U4.1 U4.2

## Polygon pours and split planes (outlines as drawn)
GND on Top Layer "GND_L01_P000" (solid, remove dead copper, pour order 0): -149,279 -149,4480 -58,4571 2901,4571 2979,4493 2979,279 2900,200 -70,200

## Keep-outs
Keep-Out Layer:
  rectangle: 993.28,3077.28 1402.72,3486.72

## Other copper
Top Layer:
  region: 622.82,416.6 622.82,415.97 624.38,415.97 624.38,416.6 625.01,416.6 625.01,415.35 622.19,415.35 622.19,416.6 622.66,416.6
  region: 602.15,415.97 602.15,416.6 602.62,416.6 602.62,416.44 602.93,416.44 602.93,416.6 603.87,416.6 603.87,416.44 604.03,416.44 604.03,416.13 603.87,416.13 603.87,415.97 603.71,415.97 603.71,415.82 603.56,415.82 603.56,415.5 603.71,415.5 603.71,415.35 603.87,415.35 603.87,415.19 604.03,415.19 604.03,415.03 602.15,415.03 602.15,415.82
  region: 199 vertices and 0 holes, not listed, extent 516.49,227.9 617.81,382.62
  region: 169 vertices and 0 holes, not listed, extent 462.93,227.58 491.9,382.93
  region: 5481 vertices and 0 holes, not listed, extent 216.91,227.58 445.55,415.97
  region: 834.74,105.63 834.74,104.9 836.57,104.9 836.57,105.63 837.3,105.63 837.3,104.17 834.01,104.17 834.01,105.63 834.56,105.63
  region: 810.63,104.9 810.63,105.63 811.17,105.63 811.17,105.45 811.54,105.45 811.54,105.63 812.64,105.63 812.64,105.45 812.82,105.45 812.82,105.08 812.64,105.08 812.64,104.9 812.45,104.9 812.45,104.72 812.27,104.72 812.27,104.35 812.45,104.35 812.45,104.17 812.64,104.17 812.64,103.99 812.82,103.99 812.82,103.8 810.63,103.8 810.63,104.72
  region: 4164.94,880.71 4164.94,879.33 4168.39,879.33 4168.39,880.71 4169.77,880.71 4169.77,877.95 4163.56,877.95 4163.56,880.71 4164.6,880.71
  region: 4119.42,879.33 4119.42,880.71 4120.45,880.71 4120.45,880.37 4121.14,880.37 4121.14,880.71 4123.21,880.71 4123.21,880.37 4123.56,880.37 4123.56,879.68 4123.21,879.68 4123.21,879.33 4122.87,879.33 4122.87,878.99 4122.52,878.99 4122.52,878.3 4122.87,878.3 4122.87,877.95 4123.21,877.95 4123.21,877.61 4123.56,877.61 4123.56,877.27 4119.42,877.27 4119.42,878.99
  text "NGOC" at 2437.1,4158.7 h180
  text "CAM" at 2481.1,4016.7 h180

## Silkscreen, mask and mechanical layers (free items; w line width, h text height)
Top Overlay:
  region: 915.75,394.61 915.01,394.61 915.01,394.98 915.75,394.98
  region: 963.49,393.51 962.39,393.51 962.39,394.98 966.06,394.98 966.06,393.51 963.86,393.51
Mechanical 1:
  the board outline again, w10

## Text inside footprints (layer, text, board x,y; h text height)
B*1: Bottom Overlay "+" at 2157,2952 h112.5 r180
J4: Top 3D Body "PCB Edge" at 2136.87,218.83 h16